# EAGLE board untitled (EAGLE 6.1)
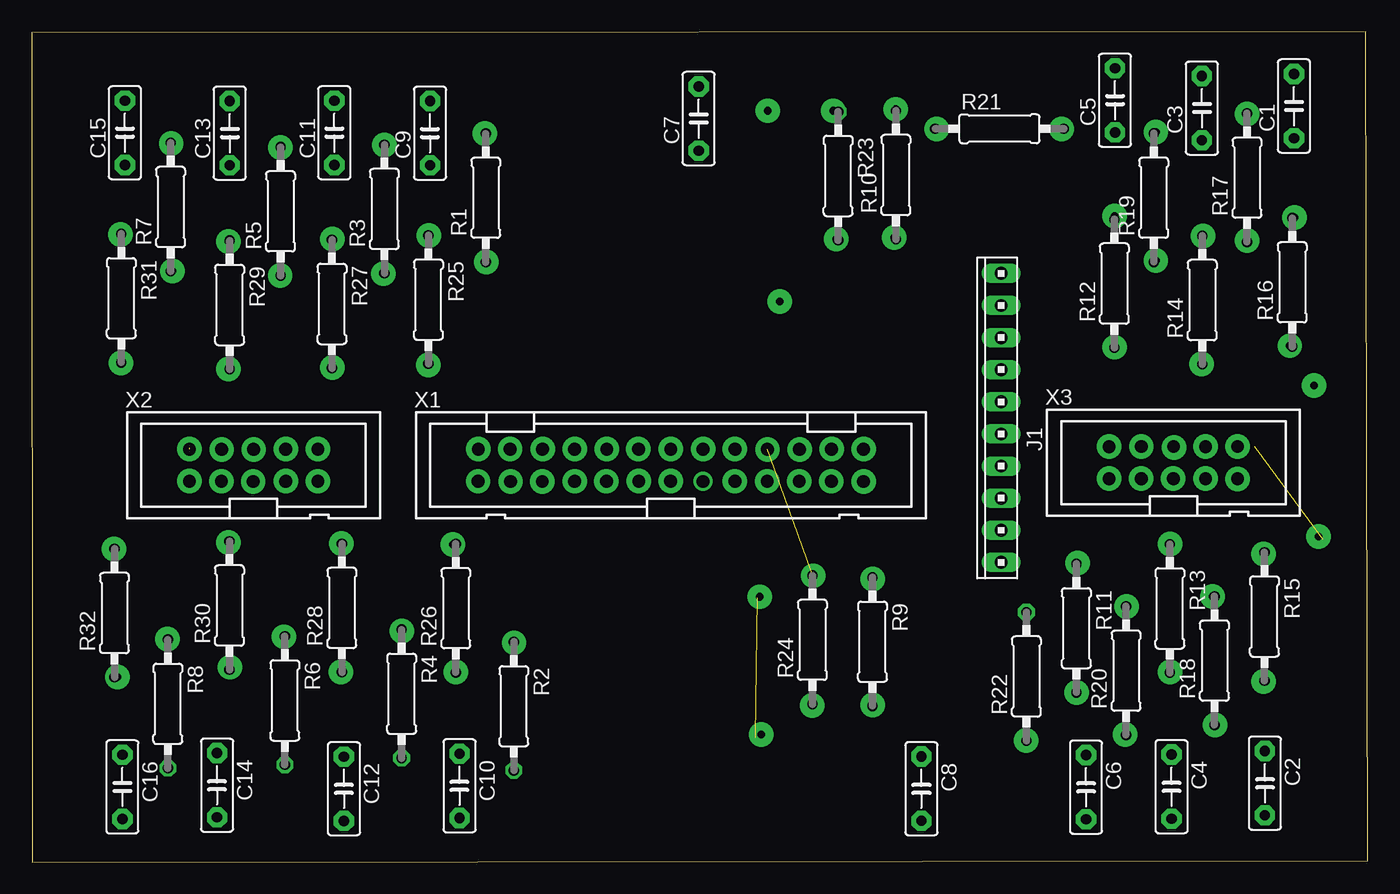
[diagram p0: board, top side]
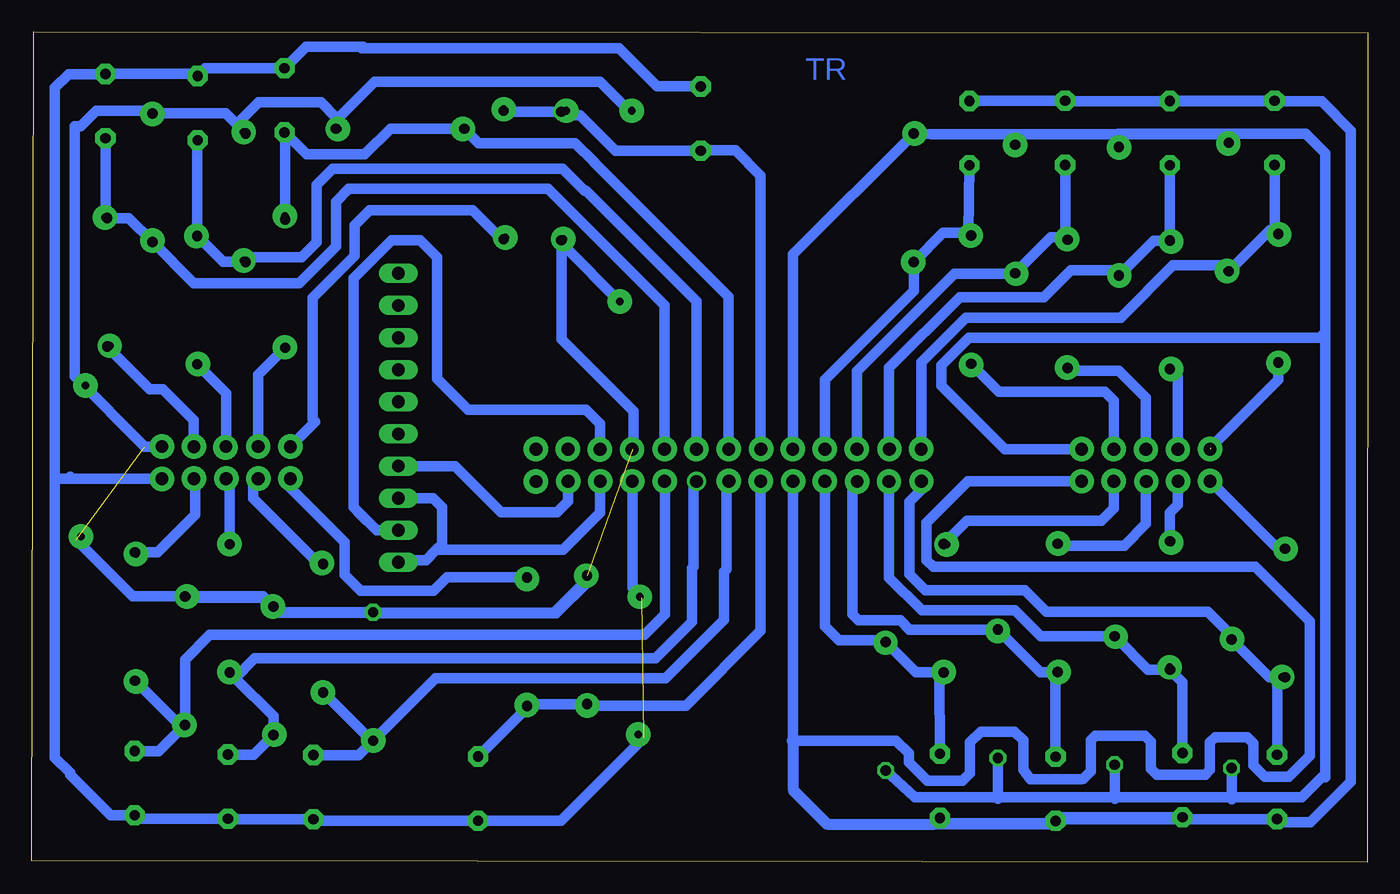
[diagram p1: board, bottom side, seen from below]

Size 105.73 x 65.68 mm. Coordinates in mm from the lower left corner, seen from the top.
Outline: 0.05,0 105.73,0.08 105.56,65.68 0,65.6 0.05,0
Copper layers (1*16): Top 0.035mm / dielectric 1.5mm / Bottom 0.035mm
Design rules: minimum track width 10mil, minimum drill 24mil, track to track 8mil, track to pad 8mil, pad to pad 8mil, via to via 8mil, smd to smd 8mil, copper to edge 40mil, drill to drill 8mil, minimum pad ring 10mil, minimum via ring 8mil, stop-mask expansion 4mil, vias tented up to drill 0mil, thermal gap 10mil

## Footprints (pad centres in the part's own frame; a part is rotated, then mirrored left to right if it is on the bottom)
C5B2.5 = drill 0.813 pad 1.6 octagon: 1 -2.54,0; 2 2.54,0
10X10MTA = drill 1.016 long: 1 11.43,0; 2 8.89,0; 3 6.35,0; 4 3.81,0; 5 1.27,0; 6 -1.27,0; 7 -3.81,0; 8 -6.35,0; 9 -8.89,0; 10 -11.43,0
0207/10 = drill 0.813 octagon: 1 -5.08,0; 2 5.08,0
PAK100/2500-26 = drill 1 pad 1.422: 1 -15.24,-1.27; 2 -15.24,1.27; 3 -12.7,-1.27; 4 -12.7,1.27; 5 -10.16,-1.27; 6 -10.16,1.27; 7 -7.62,-1.27; 8 -7.62,1.27; 9 -5.08,-1.27; 10 -5.08,1.27; 11 -2.54,-1.27; 12 -2.54,1.27; 13 0,-1.27; 14 0,1.27; 15 2.54,-1.27; 16 2.54,1.27; 17 5.08,-1.27; 18 5.08,1.27; 19 7.62,-1.27; 20 7.62,1.27; 21 10.16,-1.27; 22 10.16,1.27; 23 12.7,-1.27; 24 12.7,1.27; 25 15.24,-1.27; 26 15.24,1.27
PAK100/2500-10 = drill 1 pad 1.422: 1 -5.08,-1.27; 2 -5.08,1.27; 3 -2.54,-1.27; 4 -2.54,1.27; 5 0,-1.27; 6 0,1.27; 7 2.54,-1.27; 8 2.54,1.27; 9 5.08,-1.27; 10 5.08,1.27

## Placement (x,y rotation side)
C1  [C5B2.5]  99.88,59.79 90 top
C2  [C5B2.5]  97.58,6.24 270 top
C3  [C5B2.5]  92.6,59.63 90 top
C4  [C5B2.5]  90.19,5.96 270 top
C5  [C5B2.5]  85.72,60.25 90 top
C6  [C5B2.5]  83.43,5.92 270 top
C7  [C5B2.5]  52.78,58.8 90 top
C8  [C5B2.5]  70.4,5.8 270 top
C9  [C5B2.5]  31.53,57.64 90 top
C10  [C5B2.5]  33.86,6.03 270 top
C11  [C5B2.5]  23.96,57.68 90 top
C12  [C5B2.5]  24.71,5.79 270 top
C13  [C5B2.5]  15.68,57.65 90 top
C14  [C5B2.5]  14.67,6.07 270 top
C15  [C5B2.5]  7.39,57.68 90 top
C16  [C5B2.5]  7.18,5.94 270 top
J1  [10X10MTA]  76.71,35.13 90 top
R1  [0207/10]  35.94,52.54 90 top
R2  [0207/10]  38.16,12.33 270 top
R3  [0207/10]  27.91,51.65 90 top
R4  [0207/10]  29.28,13.31 270 top
R5  [0207/10]  19.7,51.46 90 top
R6  [0207/10]  20.04,12.78 270 top
R7  [0207/10]  11,51.8 90 top
R8  [0207/10]  10.78,12.51 270 top
R9  [0207/10]  66.53,17.42 270 top
R10  [0207/10]  68.38,54.34 90 top
R11  [0207/10]  82.66,18.49 270 top
R12  [0207/10]  85.67,45.75 90 top
R13  [0207/10]  90.06,20.06 270 top
R14  [0207/10]  92.62,44.44 90 top
R15  [0207/10]  97.55,19.42 270 top
R16  [0207/10]  99.75,45.85 90 top
R17  [0207/10]  96.17,54.13 90 top
R18  [0207/10]  93.59,15.92 90 top
R19  [0207/10]  88.79,52.54 90 top
R20  [0207/10]  86.6,15.13 90 top
R21  [0207/10]  76.58,58 0 top
R22  [0207/10]  78.71,14.68 90 top
R23  [0207/10]  63.81,54.26 270 top
R24  [0207/10]  61.79,17.57 90 top
R25  [0207/10]  31.4,44.48 270 top
R26  [0207/10]  33.57,20.08 90 top
R27  [0207/10]  23.77,44.14 270 top
R28  [0207/10]  24.55,20.1 90 top
R29  [0207/10]  15.67,44.07 270 top
R30  [0207/10]  15.66,20.29 90 top
R31  [0207/10]  7.1,44.6 270 top
R32  [0207/10]  6.56,19.69 90 top
X1  2526-  [PAK100/2500-26]  50.58,31.38 0 top
X2  2510-  [PAK100/2500-10]  17.56,31.38 0 top
X3  2510-  [PAK100/2500-10]  90.35,31.59 0 top

## Library data of the parts
C1-C16 = capacitor-wima
J1 = con-amp
R1-R32 = resistor
X1-X3 = con-3m

## Nets
N$1: R32.2 X2.1
N$2: R31.2 X2.2
N$3: R30.2 X2.3
N$4: R29.2 X2.4
N$5: R28.2 X2.5
N$6: R27.2 X2.6
N$7: R26.2 X2.7
N$8: R25.2 X2.8
N$9: C16.1 R8.1 R32.1 X1.1
N$10: C1.1 R16.2 R17.1 X1.18
N$13: C2.1 R15.2 R18.1 X1.17
N$14: R9.1 X3.1
N$15: R10.1 X3.2
N$16: R11.1 X3.3
N$17: R12.1 X3.4
N$18: R13.1 X3.5
N$19: R14.1 X3.6
N$20: R15.1 X3.7
N$21: J1.8 J1.10 X1.21
N$22: J1.9 X1.22
N$23: J1.7 X1.23
N$24: R16.1 X3.8
N$25: C3.1 R14.2 R19.1 X1.16
N$26: C4.1 R13.2 R20.1 X1.15
N$27: C5.1 R12.2 R21.1 X1.14
N$28: C6.1 R11.2 R22.1 X1.13
N$29: C7.1 R10.2 R23.1 X1.12
N$30: C8.1 R9.2 R24.1 X1.11
N$31: R17.2 R18.2 R19.2 R20.2 R21.2 R22.2 R23.2 R24.2 X1.20 X3.10
N$33: C1.2 C2.2 C3.2 C4.2 C5.2 C6.2 C7.2 C8.2 X1.19 X3.9
N$34: C15.1 R7.1 R31.1 X1.2
N$107: C14.1 R6.1 R30.1 X1.3
N$108: C13.1 R5.1 R29.1 X1.4
N$109: C12.1 R4.1 R28.1 X1.5
N$110: C11.1 R3.1 R27.1 X1.6
N$111: C10.1 R2.1 R26.1 X1.7
N$112: C9.1 R1.1 R25.1 X1.8
N$113: R1.2 R2.2 R3.2 R4.2 R5.2 R6.2 R7.2 R8.2 X1.10 X2.10
N$114: C9.2 C10.2 C11.2 C12.2 C13.2 C14.2 C15.2 C16.2 X1.9 X2.9

## Tracks (layer width: path | path; a pad name or v marks a point on that pad's centre or on a via)
N$1
  Bottom 0.813: R32.2 7.15,24.77 X2.1
N$2  (1 unrouted)
  Bottom 0.813: R31.2 7.1,38.16 12.48,32.78
N$3
  Bottom 0.813: R30.2 15.66,27.64 15.04,28.26 15.04,30.09 X2.3
N$4
  Bottom 0.813: X2.4 15.02,38.34 R29.2
N$5
  Bottom 0.813: X2.5 17.56,26.74 19.27,25.03 24.41,25.03 R28.2
N$6
  Bottom 0.813: X2.6 17.56,36.71 19.69,38.84 23.54,38.84 R27.2
N$7
  Bottom 0.813: X2.7 20.1,27.99 21.1,27 31.72,27 R26.2
N$8
  Bottom 0.813: X2.8 20.1,36.49 20.81,37.19 29.19,37.19 R25.2
N$9
  Bottom 0.813: C16.1 7.18,13.99 R32.1 7.8,14.61 R8.1 10.78,17.91 12.66,19.79 25.43,19.79 27.13,21.49 35.02,21.49 36.29,22.76 36.29,28.48 35.34,29.43 X1.1
N$10
  Bottom 0.813: R17.1 98.05,50.93 R16.2 99.88,51.06 C1.1 | X1.18 55.66,44.02 62.94,51.3 62.94,51.32 64.85,53.23 80.64,53.23 81.64,52.23 81.64,48.7 84.57,45.77 92.89,45.77 R17.1 | 96.08,48.96 R17.1
N$13
  Bottom 0.813: R18.1 94.06,10.84 R15.2 | C2.1 95.66,8.77 R18.1 | R18.1 93.59,16 91.63,17.95 57.24,17.95 55.62,19.58 55.62,23.42 55.61,23.43 55.61,30.05 X1.17
N$14
  Bottom 0.813: R9.1 72.87,22.5 73.93,21.44 79.7,21.44 80.97,22.71 80.97,25.31 85.27,29.61 X3.1 85.11,30.47
N$15
  Bottom 0.813: R10.1 68.54,49.26 70.85,51.57 78.97,51.57 80.17,50.37 80.17,47.96 83.5,44.63 83.5,35.03 83.3,34.83 X3.2
N$16
  Bottom 0.813: R11.1 83.02,23.57 88.21,28.76 88.21,29.91 X3.3
N$17
  Bottom 0.813: X3.4 87.81,38.53 R12.1
N$18
  Bottom 0.813: R13.1 90.06,30.03 X3.5
N$19
  Bottom 0.813: X3.6 90.35,37.08 R14.1
N$20
  Bottom 0.813: R15.1 95.76,24.5 92.79,27.46 92.79,30.23 X3.7
N$21
  Bottom 0.813: X1.21 60.74,27.64 63.69,24.68 73.71,24.68 | 73.71,24.68 74.53,23.87 76.54,23.87 J1.10 | J1.8 73.97,28.78 73.26,28.07 73.26,25.14 73.71,24.68
N$22
  Bottom 0.813: 79.84,27.64 78.43,26.24 J1.9 78.43,26.24 80.24,28.04 80.24,46.17 77.24,49.17 74.98,49.17 73.64,47.83 73.64,38.24 71.18,35.77 61.86,35.77 60.74,34.66 X1.22
N$23
  Bottom 0.813: J1.7 72.21,31.32 68.57,27.68 64.15,27.68 63.28,28.55 X1.23
N$24
  Bottom 0.813: X3.8 92.89,34.94 95.35,37.4 96.38,37.4 R16.1
N$25
  Bottom 0.813: C3.1 92.62,57.06 R14.2 90.56,47.46 R19.1 88.41,47.83 84.37,47.83 83.17,49.03 83.17,53.56 81.9,54.83 63.72,54.83 61.98,53.09 61.86,53.09 53.12,44.35 X1.16
N$26
  Bottom 0.813: 89.63,14.55 86.6,11.51 R20.1 88.15,8.5 C4.1 | 89.63,14.55 R13.2 | 89.63,14.55 88.08,16.11 56.35,16.11 53.46,18.99 53.46,23.25 53.35,23.36 53.35,29.88 X1.15
N$27
  Bottom 0.813: R12.2 85.67,57.66 C5.1 83.97,55.96 79.37,55.96 77.34,58 R21.1 70.37,56.87 62.74,56.87 61.24,55.37 61.24,55.36 50.58,44.7 X1.14
N$28
  Bottom 0.813: R22.1 78.71,9.46 R11.2 | C6.1 79.85,8.46 R22.1 | R22.1 73.77,14.53 55.59,14.53 50.95,19.17 50.95,22.95 50.75,23.15 50.75,29.93 X1.13
N$29
  Bottom 0.813: X1.12 48.04,54.27 50.05,56.28 52.76,56.28 C7.1 59.54,56.26 62.33,59.05 63.52,59.05 R23.1 68.31,59.34 R10.2
N$30
  Bottom 0.813: X1.11 48.04,18.27 53.97,12.35 61.64,12.35 R24.1 66.38,12.49 R9.2 66.53,12.21 C8.1
N$31  (via drill 0.6 pad 1.93)  (2 unrouted)
  Bottom 0.813: R18.2 87.39,21 R20.2 86.15,19.76 R22.2 78.62,19.66 64.22,19.66 61.79,22.1 R24.2 61.79,22.31 64.38,19.71 86.3,19.71 87.51,20.92 93.05,20.92 93.17,21.04 97.74,21.04 102.2,25.5 | X1.20 58.12,32.73 58.12,35.66 63.81,41.36 R23.2 63.57,49.18 63.57,48.7 v59.2,44.33 | R19.2 88.79,57.65 89.5,58.36 | 89.5,58.36 90.36,59.22 96.15,59.22 R17.2 96.38,59.42 100.63,59.42 101.84,58.21 102.32,58.21 102.32,38.42 96.76,32.86 X3.10 | 89.5,58.36 87.76,60.1 82.83,60.1 81.66,58.92 R21.2 81.66,58.64 78.59,61.71 60.77,61.71 58.48,59.42
N$33  (1 unrouted)
  Bottom 0.813: 79.51,64.5 79.76,64.5 | 79.76,64.5 84.01,64.5 C5.2 91.98,62.79 C3.2 92.76,62.33 C1.2 99.9,62.31 102.8,62.31 103.89,61.23 103.89,30.57 | 79.76,64.5 79.63,64.36 59.27,64.36 56.25,61.34 C7.2 | X3.9 102.55,30.32 | 102.55,30.32 102.68,30.45 | 57.27,9.82 63.83,3.26 C8.2 83.3,3.26 C6.2 90.16,3.38 C4.2 97.3,3.42 C2.2 99.46,3.69 102.68,6.92 102.68,7.04 103.89,8.25 103.89,30.57 | X1.19 58.2,21.69 57.43,20.92 | 102.55,30.32 103.63,30.32 103.89,30.57
N$34
  Bottom 0.813: C15.1 7.39,49.96 | 7.39,49.96 R31.1 | X1.2 35.34,39.54 31.81,43.06 19.56,43.06 15.43,47.19 11.47,47.19 R7.1 7.76,49.96 7.39,49.96
N$40  (via drill 1 pad 1.93)
  other vias: 63.29,32.65
N$41  (via drill 1 pad 1.93)
  other vias: 63.27,30.12
N$42  (via drill 1 pad 1.93)
  other vias: 65.83,30.1
N$43  (via drill 1 pad 1.93)
  other vias: 65.83,32.67
N$44  (via drill 1 pad 1.93)
  other vias: 60.76,32.63
N$45  (via drill 1 pad 1.93)
  other vias: 60.74,30.12
N$46  (via drill 1 pad 1.93)
  other vias: 58.2,30.12
N$47  (via drill 1 pad 1.93)
  other vias: 58.22,32.63
N$48  (via drill 1 pad 1.93)
  other vias: 55.65,32.65
N$49  (via drill 1 pad 1.93)
  other vias: 55.65,30.12
N$50  (via drill 0.6 pad 1.93)
  other vias: 57.6,20.98
N$51  (via drill 1 pad 1.93)
  other vias: 53.13,32.65
N$52  (via drill 1 pad 1.93)
  other vias: 50.58,32.65
N$53  (via drill 1 pad 1.93)
  other vias: 50.56,30.13
N$54  (via drill 1 pad 1.93)
  other vias: 48.04,30.13
N$55  (via drill 1 pad 1.93)
  other vias: 48,32.65
N$56  (via drill 1 pad 1.93)
  other vias: 45.5,32.65
N$57  (via drill 1 pad 1.93)
  other vias: 45.49,30.12
N$58  (via drill 1 pad 1.93)
  other vias: 42.97,30.12
N$59  (via drill 1 pad 1.93)
  other vias: 42.99,32.65
N$60  (via drill 1 pad 1.93)
  other vias: 35.34,32.65
N$61  (via drill 1 pad 1.93)
  other vias: 35.32,30.12
N$62  (via drill 1 pad 1.93)
  other vias: 37.9,30.1
N$63  (via drill 1 pad 1.93)
  other vias: 37.86,32.65
N$64  (via drill 1 pad 1.93)
  other vias: 40.43,32.67
N$65  (via drill 1 pad 1.93)
  other vias: 40.41,30.1
N$66  (via drill 1 pad 1.93)
  other vias: 12.5,30.13
N$67  (via drill 1 pad 1.93)
  other vias: 12.48,32.67
N$68  (via drill 1 pad 1.93)
  other vias: 15.04,32.63
N$69  (via drill 1 pad 1.93)
  other vias: 15.02,30.12
N$70  (via drill 1 pad 1.93)
  other vias: 17.57,32.63
N$71  (via drill 1 pad 1.93)
  other vias: 17.53,30.1
N$72  (via drill 1 pad 1.93)
  other vias: 20.11,30.13
N$73  (via drill 1 pad 1.93)
  other vias: 20.13,32.67
N$74  (via drill 1 pad 1.93)
  other vias: 22.64,32.67
N$75  (via drill 1 pad 1.93)
  other vias: 22.66,30.12
N$76  (via drill 1 pad 1.93)
  other vias: 95.42,30.31
N$77  (via drill 1 pad 1.93)
  other vias: 95.42,32.87
N$78  (via drill 1 pad 1.93)
  other vias: 92.88,32.85
N$79  (via drill 1 pad 1.93)
  other vias: 92.9,30.34
N$80  (via drill 1 pad 1.93)
  other vias: 90.32,30.33
N$82  (via drill 1 pad 1.93)
  other vias: 87.8,32.87
N$83  (via drill 1 pad 1.93)
  other vias: 87.78,30.33
N$84  (via drill 1 pad 1.93)
  other vias: 85.26,30.33
N$85  (via drill 1 pad 1.93)
  other vias: 85.26,32.85
N$107
  Bottom 0.813: C14.1 14.67,14.22 R30.1 17.39,15.21 R6.1 25.88,17.86 27.92,19.9 35.29,19.9 37.88,22.49 X1.3
N$108
  Bottom 0.813: C13.1 R29.1 | R29.1 | X1.4 37.88,39.08 32.28,44.68 25.64,44.68 23.51,46.81 20.13,46.81 R5.1 16.93,49.16 R29.1
N$109
  Bottom 0.813: C12.1 24.71,14.86 R28.1 25.92,15.02 R4.1 36.27,18.39 36.98,19.1 40.32,19.1 40.8,19.58 40.8,29.73 X1.5
N$110
  Bottom 0.813: C11.1 23.96,49.41 | 23.96,49.41 R27.1 | X1.6 40.42,38.8 32.71,46.51 27.97,46.51 R3.1 25.07,49.41 23.96,49.41
N$111
  Bottom 0.813: C10.1 33.89,14.67 R26.1 35.75,15 R2.1 38.29,17.54 41.85,17.54 42.96,18.65 X1.7
N$112
  Bottom 0.813: C9.1 31.61,49.77 | 31.61,49.77 R25.1 | X1.8 42.96,38.14 35.94,45.16 R1.1 33.62,49.77 31.61,49.77
N$113
  Bottom 0.813: R7.2 11.05,56.85 11.77,57.58 19.62,57.58 | 19.62,57.58 27.81,57.58 | 27.81,57.58 34.53,57.58 R1.2 45.5,48.05 X1.10 | R3.2 27.91,57.48 27.81,57.58 | 19.62,57.58 19.7,57.49 R5.2 19.7,57.58 19.74,57.62 4.9,57.62 3.35,56.07 3.35,41.91 | 3.35,41.91 3.35,6.72 3.63,6.72 5.25,5.1 10.78,5.1 | X2.10 28.72,32.65 33.73,37.66 33.73,39.28 31.56,41.45 3.82,41.45 3.35,41.91 | 10.78,5.1 20.03,5.14 | 20.03,5.14 29.24,5.1 | 29.24,5.1 35.85,5.1 R2.2 | R8.2 10.78,4.96 10.78,5.1 | R6.2 20.04,4.99 20.03,5.14 | R4.2 29.28,5 29.24,5.1
N$114
  Bottom 0.813: C15.2 15.64,60.22 C13.2 | C13.2 23.92,60.19 C11.2 31.49,60.22 C9.2 | C16.2 14.54,3.4 C14.2 24.37,3.53 C12.2 25.22,3.25 25.43,3.05 33.42,3.05 C10.2 34.41,2.94 42.7,2.94 45.5,5.74 X1.9 | C13.2 3.67,60.19 1.34,57.86 1.34,6.35 4.54,3.15 6.93,3.15 C16.2 | X2.9 31.65,30.11 34.92,26.84 34.92,23.87 34.39,23.34 8.91,23.34 4.61,19.05 4.61,8.4 6.26,6.76 8.16,6.76 8.75,7.34 | 8.75,7.34 | 8.75,7.34 9.06,7.66 9.06,9.41 9.54,9.88 12.08,9.88 12.51,9.46 12.51,7.29 12.88,6.91 16.69,6.91 17.17,7.39 17.17,9.51 17.65,9.99 21.57,9.99 21.94,9.62 21.94,7.18 22.52,6.6 22.67,6.53 26.71,6.53 27.27,7.31 27.27,9.63 27.96,10.32 30.64,10.32 31.5,9.45 31.5,7.01 32.07,6.44 34.87,6.44 36.33,7.9 36.33,8.59 37.34,9.6 45.56,9.6 45.44,9.48 45.44,5.58 42.85,2.99 24.92,2.99 24.51,3.4 C16.2
N$115  (via drill 0.6 pad 1.93)
  other vias: 90.38,32.79
N$116  (via drill 0.6 pad 1.93)
  other vias: 57.72,10.07
N$117  (via drill 0.6 pad 1.93)
  other vias: 58.24,59.42
N$118  (via drill 0.6 pad 1.93)
  other vias: 101.84,25.75
N$119  (via drill 0.6 pad 1.93)
  other vias: 101.48,37.69
N$120  (via drill 0.6 pad 1.93)
  other vias: 7.04,49.64
N$121  (via drill 0.6 pad 1.93)
  other vias: 11.14,46.74
N$122  (via drill 0.6 pad 1.93)
  other vias: 11.05,56.83
N$123  (via drill 0.6 pad 1.93)
  other vias: 19.7,56.5
N$124  (via drill 0.6 pad 1.93)
  other vias: 15.57,49.09
N$125  (via drill 0.6 pad 1.93)
  other vias: 19.66,46.38
N$126  (via drill 0.6 pad 1.93)
  other vias: 23.79,49.27
N$127  (via drill 0.6 pad 1.93)
  other vias: 27.91,56.72
N$128  (via drill 0.6 pad 1.93)
  other vias: 31.42,49.56
N$129  (via drill 0.6 pad 1.93)
  other vias: 27.84,46.53
N$130  (via drill 0.6 pad 1.93)
  other vias: 35.98,47.44
N$131  (via drill 0.6 pad 1.93)
  other vias: 35.87,57.63
N$132  (via drill 0.6 pad 1.93)
  other vias: 7.07,39.48
N$133  (via drill 0.6 pad 1.93)
  other vias: 15.57,39
N$134  (via drill 0.6 pad 1.93)
  other vias: 23.79,39.11
N$135  (via drill 0.6 pad 1.93)
  other vias: 31.38,39.3
N$136  (via drill 0.6 pad 1.93)
  other vias: 6.52,24.76
N$137  (via drill 0.6 pad 1.93)
  other vias: 15.57,25.27
N$138  (via drill 0.6 pad 1.93)
  other vias: 24.52,25.2
N$139  (via drill 0.6 pad 1.93)
  other vias: 33.32,25.12
N$140  (via drill 0.6 pad 1.93)
  other vias: 38.17,17.34
N$141  (via drill 0.6 pad 1.93)
  other vias: 29.3,18.26
N$142  (via drill 0.6 pad 1.93)
  other vias: 24.48,15.04
N$143  (via drill 0.6 pad 1.93)
  other vias: 19.95,17.82
N$144  (via drill 0.6 pad 1.93)
  other vias: 10.76,17.64
N$145  (via drill 0.6 pad 1.93)
  other vias: 15.68,15.41
N$146  (via drill 0.6 pad 1.93)
  other vias: 33.57,15.04
N$147  (via drill 0.6 pad 1.93)
  other vias: 6.8,14.64
N$148  (via drill 0.6 pad 1.93)
  other vias: 61.75,12.37
N$149  (via drill 0.6 pad 1.93)
  other vias: 66.54,12.42
N$150  (via drill 0.6 pad 1.93)
  other vias: 61.85,22.64
N$151  (via drill 0.6 pad 1.93)
  other vias: 66.54,22.39
N$153  (via drill 0.6 pad 1.93)
  other vias: 86.62,20.22
N$154  (via drill 0.6 pad 1.93)
  other vias: 82.75,23.66
N$155  (via drill 0.6 pad 1.93)
  other vias: 90.08,25.16
N$156  (via drill 0.6 pad 1.93)
  other vias: 93.43,21.01
N$157  (via drill 0.6 pad 1.93)
  other vias: 97.48,24.37
N$158  (via drill 0.6 pad 1.93)
  other vias: 97.48,14.29
N$159  (via drill 0.6 pad 1.93)
  other vias: 93.63,10.84
N$160  (via drill 0.6 pad 1.93)
  other vias: 90.08,15.03
N$161  (via drill 0.6 pad 1.93)
  other vias: 86.52,10.09
N$162  (via drill 0.6 pad 1.93)
  other vias: 82.68,13.4
N$163  (via drill 0.6 pad 1.93)
  other vias: 78.68,9.6
N$164  (via drill 0.6 pad 1.93)
  other vias: 85.7,40.71
N$165  (via drill 0.6 pad 1.93)
  other vias: 92.56,39.38
N$166  (via drill 0.6 pad 1.93)
  other vias: 99.55,40.83
N$167  (via drill 0.6 pad 1.93)
  other vias: 96.18,49.16
N$168  (via drill 0.6 pad 1.93)
  other vias: 99.91,50.97
N$169  (via drill 0.6 pad 1.93)
  other vias: 92.68,49.52
N$170  (via drill 0.6 pad 1.93)
  other vias: 88.95,47.59
N$171  (via drill 0.6 pad 1.93)
  other vias: 85.7,51.09
N$172  (via drill 0.6 pad 1.93)
  other vias: 81.48,57.97
N$173  (via drill 0.6 pad 1.93)
  other vias: 88.95,57.73
N$174  (via drill 0.6 pad 1.93)
  other vias: 96.18,59.17
N$175  (via drill 0.6 pad 1.93)
  other vias: 68.35,59.54
N$176  (via drill 0.6 pad 1.93)
  other vias: 63.42,59.42
N$177  (via drill 0.6 pad 1.93)
  other vias: 68.23,49.4
N$178  (via drill 0.6 pad 1.93)
  other vias: 63.66,49.28
N$180  (via drill 0.6 pad 1.93)
  other vias: 71.61,57.97

## Text on the board
Bottom: TR